# EAGLE board Retro|Watch (EAGLE 7.3.0)
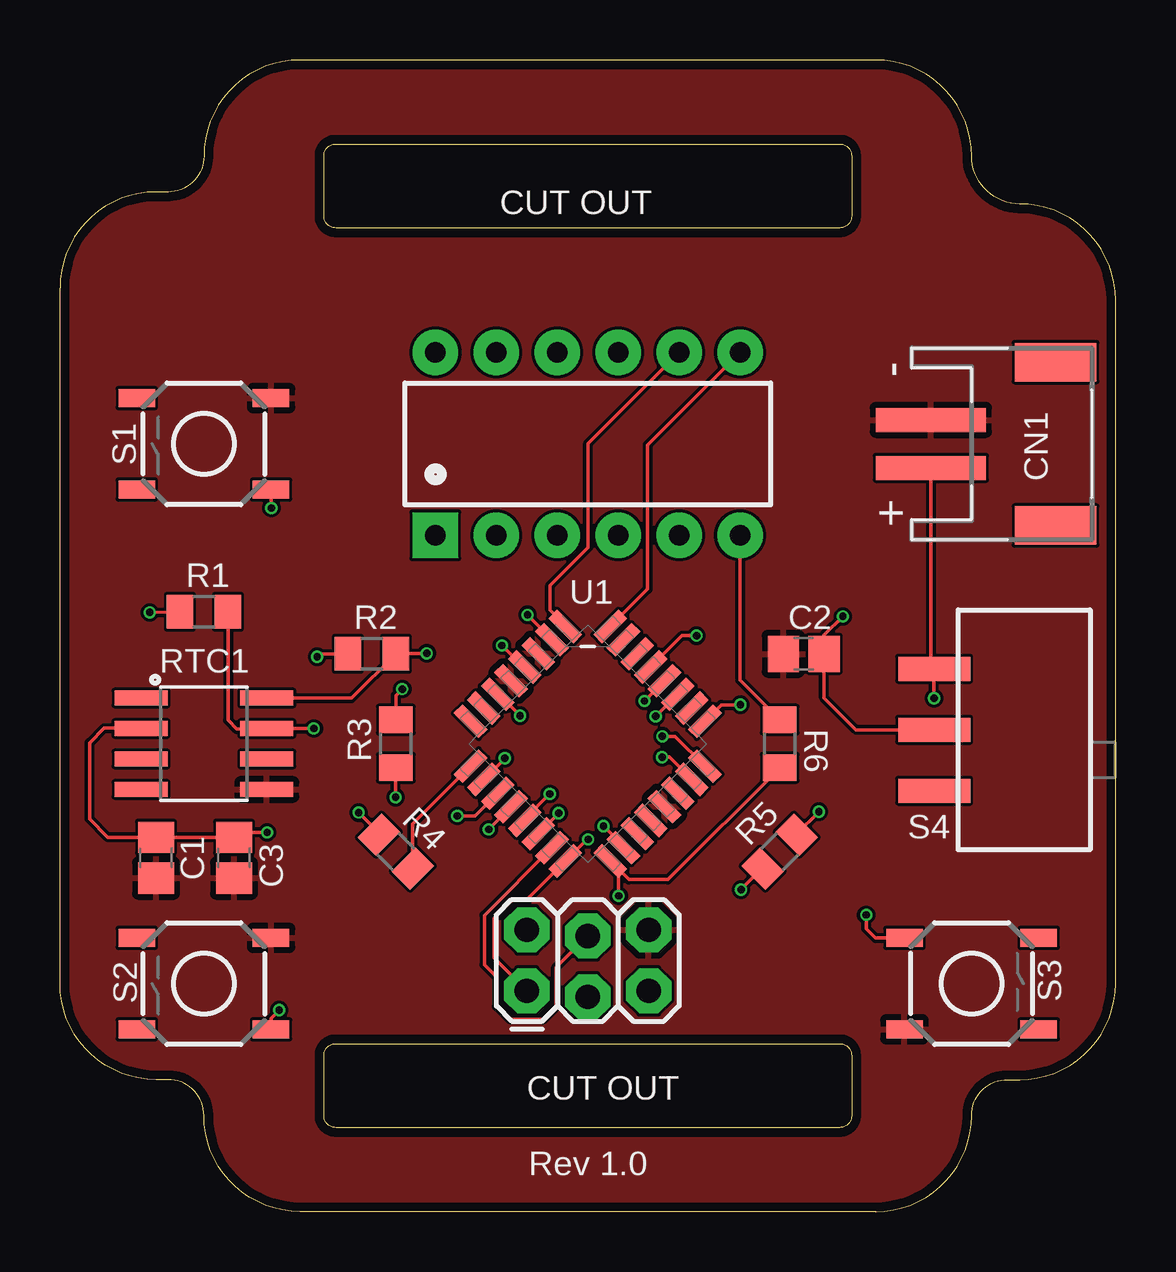
[diagram p0: board, top side]
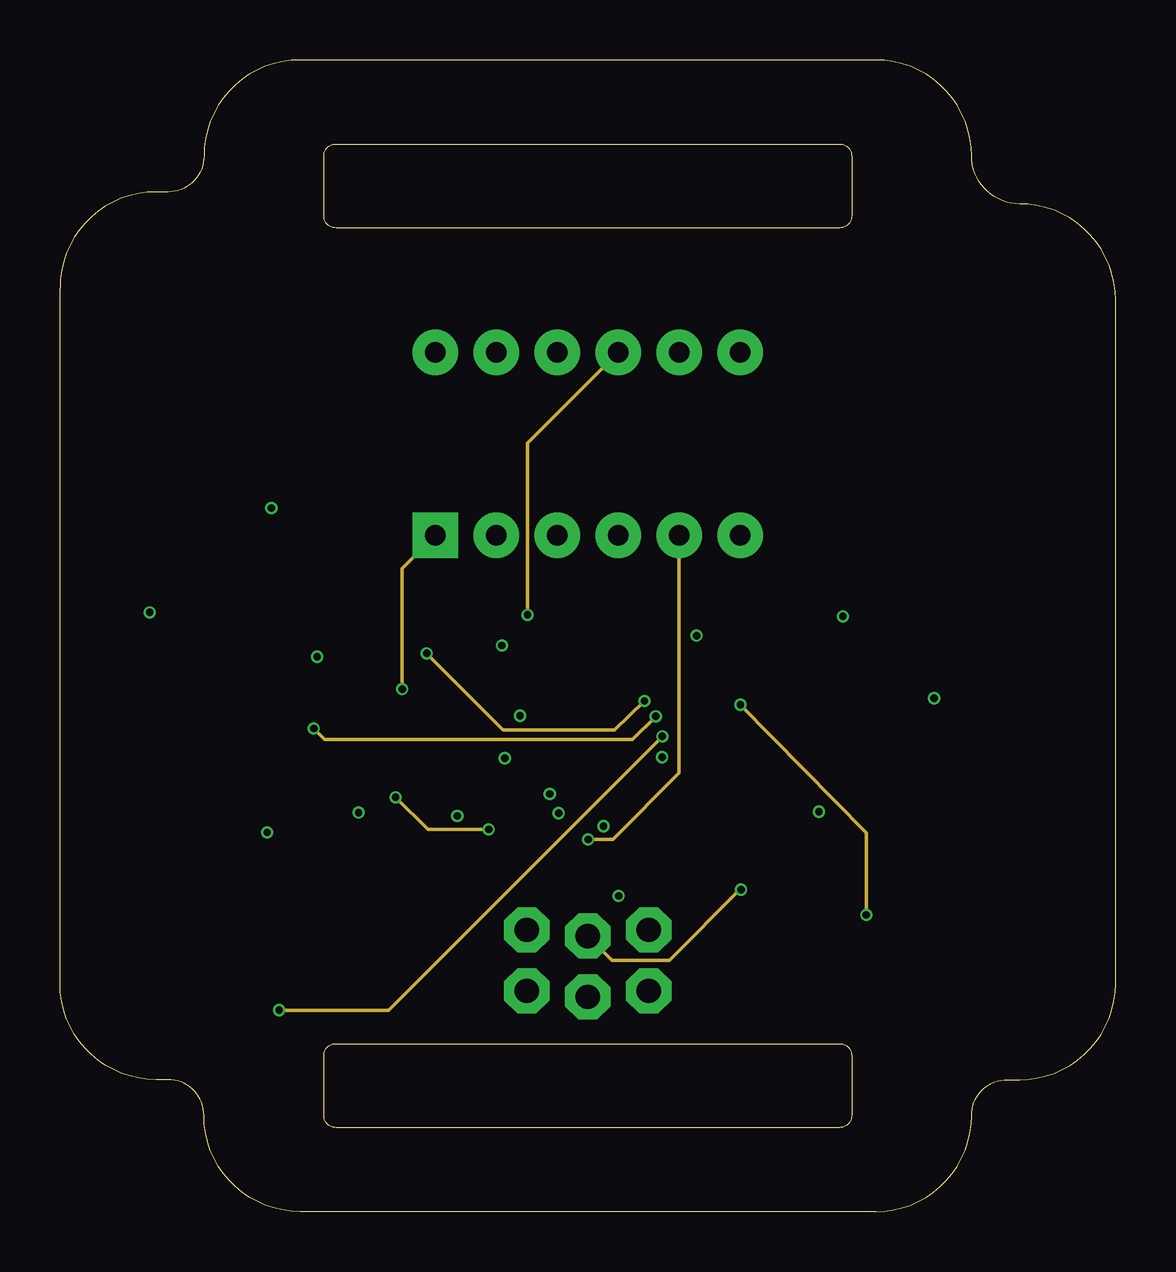
[diagram p1: board, inner layer Route2]
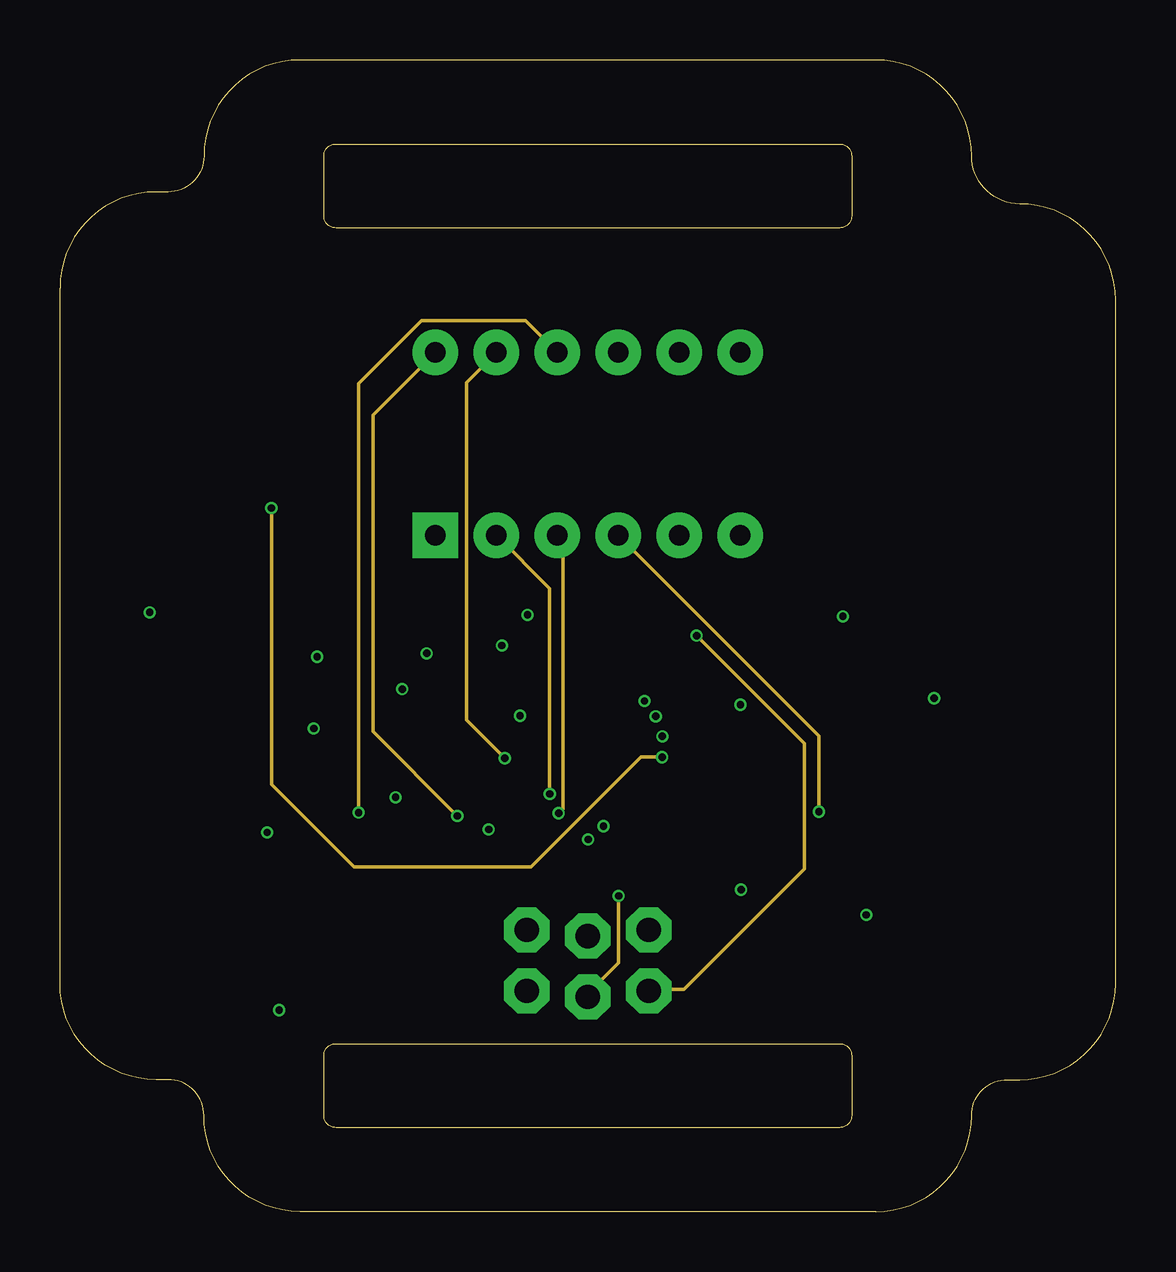
[diagram p2: board, inner layer Route15]
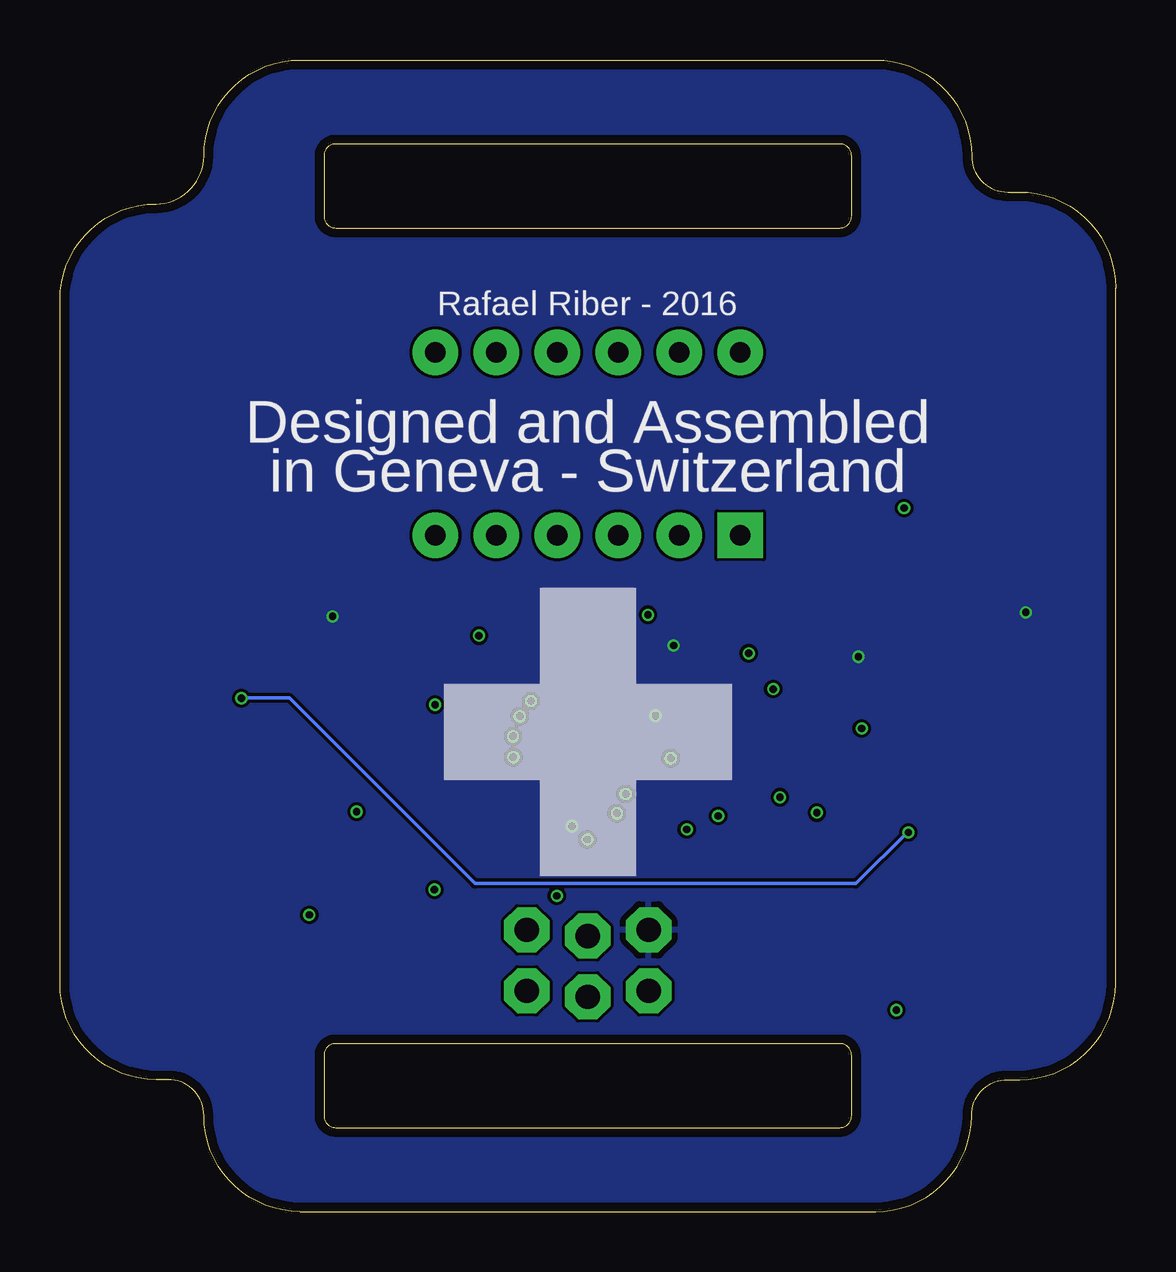
[diagram p3: board, bottom side, seen from below]

Size 44 x 48 mm. Coordinates in mm from the lower left corner, seen from the top.
Outline: 6,44 arc-90 4.5,42.5 4,42.5 arc90 0,38.5 0,9.5 arc90 4,5.5 4.5,5.5 arc-90 6,4 arc90 10,0 34,0 arc90 38,4 arc-90 39.5,5.5 40,5.5 arc90 44,9.5 44,38 arc90 40,42 arc-90 38,44 arc90 34,48 10,48 arc90 6,44
Outline: 33,44 33,41.5 arc-90 32.5,41 11.5,41 arc-90 11,41.5 11,44 arc-90 11.5,44.5 32.5,44.5 arc-90 33,44
Outline: 33,6.5 33,4 arc-90 32.5,3.5 11.5,3.5 arc-90 11,4 11,6.5 arc-90 11.5,7 32.5,7 arc-90 33,6.5
Copper layers (1*2*15*16): Top 0.035559375mm / dielectric 0.17018125mm / Route2 0.01778125mm / dielectric 47mil / Route15 0.01778125mm / dielectric 0.17018125mm / Bottom 0.035559375mm
Design rules "OSHPark-4layer *": minimum track width 5mil, minimum drill 10mil, track to track 5mil, track to pad 5mil, pad to pad 5mil, via to via 5mil, smd to smd 5mil, copper to edge 15mil, drill to drill 6mil, minimum pad ring 4mil, minimum via ring 4mil, stop-mask expansion 2.5mil, vias tented up to drill 20mil, thermal gap 10mil

## Footprints (pad centres in the part's own frame; a part is rotated, then mirrored left to right if it is on the bottom)
C0805 = smd 1.3 x 1.5: 1 -0.85,0; 2 0.85,0
JST-PH-2-SMT-RA = smd 1 x 4.6: 1 1,-3.7; 2 -1,-3.7 | smd 1.6 x 3.4: NC1 -3.4,1.5; NC2 3.4,1.5
DIL12 = drill 0.864 pad 1.905 square: 1 -6.35,-3.81 | drill 0.864 pad 1.905: 2 -3.81,-3.81; 3 -1.27,-3.81; 4 1.27,-3.81; 5 3.81,-3.81; 6 6.35,-3.81; 7 6.35,3.81; 8 3.81,3.81; 9 1.27,3.81; 10 -1.27,3.81; 11 -3.81,3.81; 12 -6.35,3.81
2X3_LOCK = drill 1.016 pad 1.88 octagon: 1 0,0; 2 0,2.54; 3 2.54,-0.254; 4 2.54,2.286; 5 5.08,0; 6 5.08,2.54
R0805 = smd 1.1 x 1.4: 1 -1,0; 2 1,0
SOIC8 = smd 0.61 x 2.21: 1 -1.905,-2.616; 2 -0.635,-2.616; 3 0.635,-2.616; 4 1.905,-2.616; 5 1.905,2.616; 6 0.635,2.616; 7 -0.635,2.616; 8 -1.905,2.616
TACTILE-SWITCH-SMD = smd 1.524 x 0.762: 1 -2.794,1.905; 2 2.794,1.905; 3 -2.794,-1.905; 4 2.794,-1.905
SWITCH-SPDT-SMD = smd 1 x 3: 1 -2.62,-3.56; 2 -0.08,-3.56; 3 2.46,-3.56
QFP80P900X900X120-32N = smd 1.473 x 0.508: 1 -4.115,2.794; 2 -4.115,2.007; 3 -4.115,1.194; 4 -4.115,0.406; 5 -4.115,-0.406; 6 -4.115,-1.194; 7 -4.115,-2.007; 8 -4.115,-2.794; 17 4.115,-2.794; 18 4.115,-2.007; 19 4.115,-1.194; 20 4.115,-0.406; 21 4.115,0.406; 22 4.115,1.194; 23 4.115,2.007; 24 4.115,2.794 | smd 0.508 x 1.473: 9 -2.794,-4.115; 10 -2.007,-4.115; 11 -1.194,-4.115; 12 -0.406,-4.115; 13 0.406,-4.115; 14 1.194,-4.115; 15 2.007,-4.115; 16 2.794,-4.115; 25 2.794,4.115; 26 2.007,4.115; 27 1.194,4.115; 28 0.406,4.115; 29 -0.406,4.115; 30 -1.194,4.115; 31 -2.007,4.115; 32 -2.794,4.115

## Placement (x,y rotation side)
C1  0.1 uF  [C0805]  4,14.75 270 top
C2  0.1 uF  [C0805]  31,23.25 180 top
C3  1 uF  [C0805]  7.25,14.75 270 top
CN1  JST-PH  [JST-PH-2-SMT-RA]  40,32 270 top
DISP1  hp  [DIL12]  22,32 0 top
JP1  ICSP  [2X3_LOCK]  19.46,9.2 0 top
LOGO1  OSHW-LOGOM-COPPER  [OSHW-LOGO-M_COPPER]  30,10 0 top
R1  10k  [R0805]  6,25 0 top
R2  10k  [R0805]  13,23.25 0 top
R3  560R  [R0805]  14,19.5 90 top
R4  560R  [R0805]  14,15 135 top
R5  560R  [R0805]  30,15 45 top
R6  560R  [R0805]  30,19.5 90 top
RTC1  DS3231M  [SOIC8]  6,19.5 270 top
S1  SKQGAFE010  [TACTILE-SWITCH-SMD]  6,32 180 top
S2  SKQGAFE010  [TACTILE-SWITCH-SMD]  6,9.5 180 top
S3  SKQGAFE010  [TACTILE-SWITCH-SMD]  38,9.5 0 top
S4  SS SMD402  [SWITCH-SPDT-SMD]  40,20 270 top
U1  ATMEGA328P-AU  [QFP80P900X900X120-32N]  22,19.5 315 top
U$1  [LOGO]  10,8.5 0 top

## Library data of the parts
C1 C2 = adafruit; MF: WALSIN; MPN: 0805B104K500CT; OC_FARNELL: 2496944
C3 CN1 R1-R6 = adafruit; OC_FARNELL: unknown
DISP1 = SparkFun-Displays; OC_FARNELL: unknown; STOREFRONT: COM-12710
JP1 = SparkFun-Connectors; OC_FARNELL: unknown
LOGO1 = SparkFun-Aesthetics; OC_FARNELL: unknown
RTC1 = SparkFun-DigitalIC; OC_FARNELL: unknown; PROD_ID: IC-11985
S1-S3 = SparkFun-Electromechanical; OC_FARNELL: unknown; PROD_ID: SWCH-08247
S4 = SparkFun-Electromechanical; OC_FARNELL: unknown
U1 = Atmel_By_element14_Batch_1-00; MF: ATMEL; MPN: ATMEGA328P-AU; OC_FARNELL: 1715486; OC_NEWARK: 14R4631; PACKAGE: TQFP-32; SUPPLIER: Atmel
U$1 = atmel

## Nets
GND: C1.2 C2.2 C3.2 CN1.2 JP1.6 RTC1.5 S1.3 S2.3 S3.3 U1.3 U1.5 U1.21
MISO: DISP1.5 JP1.1 U1.16
MOSI: JP1.4 R5.1 U1.15
N$1: DISP1.1 R3.2
N$2: DISP1.10 R4.2
N$3: DISP1.4 R5.2
N$4: DISP1.6 R6.2
PB0: R3.1 U1.12
PB1: DISP1.2 U1.13
PB2: DISP1.3 U1.14
PB6: U1.7
PB7: U1.8
PC0: S1.1 U1.23
PC1: S2.1 U1.24
PC2: S3.1 U1.25
PC3: U1.26
PD0: U1.30
PD1: U1.31
PD2: DISP1.7 U1.32
PD3: DISP1.8 U1.1
PD4: DISP1.9 U1.2
PD5: R4.1 U1.9
PD6: DISP1.11 U1.10
PD7: DISP1.12 U1.11
RESET: JP1.5 U1.29
RTC_VCC: C1.1 C3.1 CN1.1 RTC1.2 S4.1
SCK: JP1.3 R6.1 U1.17
SCL: R2.2 RTC1.8 U1.28
SDA: R1.2 RTC1.7 U1.27
VBAT: RTC1.6
VCC: C2.1 JP1.2 R1.1 R2.1 S4.2 U1.4 U1.6 U1.18

## Tracks (layer width: path | path; a pad name or v marks a point on that pad's centre or on a via)
GND
  pour Top: 0,0 44,0 44,49 0,49
MISO  (via drill 0.3)
  Top 0.152: JP1.1 18.1,10.56 18.1,12.22 18.89,13.02 19.47,13.02 U1.16 21.96,15.51 v22.02,15.51
  Route2 0.152: DISP1.5 25.81,18.28 23.05,15.51 22.02,15.51 v22.02,15.51
MOSI  (via drill 0.3)
  Top 0.152: v28.39,13.42 29.27,14.29 R5.1 | U1.15 17.69,12.35 17.69,10.29 18.22,9.76 18.22,8.55 18.75,8.01 20.16,8.01 20.69,8.54 20.69,10.17 JP1.4
  Route2 0.152: JP1.4 23.02,10.47 25.4,10.47 28.34,13.42 v28.39,13.42
N$1  (via drill 0.3)
  Top 0.152: R3.2 14,21.51 v14.27,21.78
  Route2 0.152: v14.27,21.78 14.27,26.8 DISP1.1
N$2  (via drill 0.3)
  Top 0.152: R4.2 13.29,15.79 v12.45,16.63
  Route15 0.152: v12.45,16.63 12.45,34.52 15.07,37.13 19.41,37.13 DISP1.10
N$3  (via drill 0.3)
  Top 0.152: v31.63,16.66 30.71,15.74 R5.2
  Route15 0.152: DISP1.4 31.63,19.83 v31.63,16.66
N$4
  Top 0.152: DISP1.6 28.35,22.15 R6.2
PB0  (via drill 0.3)
  Top 0.152: U1.12 v17.87,15.93 | v13.99,17.27 R3.1
  Route2 0.152: v17.87,15.93 15.33,15.93 v13.99,17.27
PB1  (via drill 0.3)
  Top 0.152: v20.42,17.41 19.38,16.37 U1.13
  Route15 0.152: DISP1.2 20.42,25.96 v20.42,17.41
PB2  (via drill 0.3)
  Top 0.152: U1.14 20.79,16.6 v20.79,16.61
  Route15 0.152: v20.79,16.61 20.96,16.78 20.96,27.72 20.73,27.95 DISP1.3
PC0  (via drill 0.3)
  Top 0.152: U1.23 25.4,18.94 v25.1,18.94 | v8.81,29.32 8.79,29.34 S1.1
  Route15 0.152: v25.1,18.94 24.21,18.94 19.63,14.36 12.26,14.36 8.81,17.81 v8.81,29.32
PC1  (via drill 0.3)
  Top 0.152: S2.1 8.79,8.05 v9.14,8.39 | v25.11,19.81 25.64,19.81 U1.24
  Route2 0.152: v9.14,8.39 13.7,8.39 v25.11,19.81
PC2  (via drill 0.3)
  Top 0.152: 35.17,11.37 S3.1 33.99,11.4 33.61,11.79 v33.61,12.37 | U1.25 27.57,21.12 v28.37,21.12
  Route2 0.152: v33.61,12.37 33.61,15.77 v28.37,21.12
PD2
  Top 0.152: DISP1.7 24.49,31.95 24.49,25.94 U1.32
PD3
  Top 0.152: U1.1 21.07,24.45 20.44,25.08 20.44,26.1 22.02,27.68 22.02,32.02 DISP1.8
PD4  (via drill 0.3)
  Top 0.152: v19.49,24.87 20.51,23.85 U1.2
  Route2 0.152: DISP1.9 19.49,32.03 v19.49,24.87
PD5
  Top 0.152: R4.1 14.71,16.16 U1.9
PD6  (via drill 0.3)
  Top 0.152: U1.10 v18.54,18.88 v18.54,18.89
  Route15 0.152: v18.54,18.89 16.94,20.5 16.94,34.56 DISP1.11
PD7  (via drill 0.3)
  Top 0.152: v16.56,16.49 17.3,16.49 U1.11
  Route15 0.152: DISP1.12 13.05,33.21 13.05,20 v16.56,16.49
RESET  (via drill 0.3)
  Top 0.152: U1.29 25.93,24.01 v26.54,24.01
  Route15 0.152: JP1.5 24.54,9.26 26.01,9.26 31.04,14.28 31.04,19.5 v26.54,24.01
RTC_VCC  (via drill 0.3)
  Top 0.152: CN1.1 36.3,22.76 S4.1 v36.44,21.4 | v8.63,15.8 7.45,15.8 C3.1 C1.1 2,15.6 1.23,16.37 1.23,19.54 1.85,20.15 RTC1.2
  Bottom 0.152: v8.63,15.8 8.66,15.83 10.82,13.67 26.7,13.67 34.42,21.4 v36.44,21.4
SCK  (via drill 0.3)
  Top 0.152: U1.17 23.28,14.27 | v23.29,13.16 23.29,14.26 U1.17 | R6.1 25.34,13.84 23.71,13.84 U1.17
  Route15 0.152: v23.29,13.16 23.29,10.37 22,9.09 JP1.3
SCL  (via drill 0.3)
  Top 0.152: RTC1.8 12.15,21.41 R2.2 14.02,23.27 v15.29,23.27 | v24.36,21.29 24.41,21.33 U1.28
  Route2 0.152: v15.29,23.27 18.48,20.08 23.11,20.08 v24.36,21.29
SDA  (via drill 0.3)
  Top 0.152: R1.2 7,20.49 7.37,20.11 8.59,20.11 RTC1.7 v10.58,20.14 v10.58,20.13 | v24.84,20.64 v24.84,20.65 U1.27
  Route2 0.152: v10.58,20.13 11.04,19.67 23.86,19.67 v24.84,20.64
VCC  (via drill 0.3)
  Top 0.152: S4.2 33.18,20.08 31.85,21.41 C2.1 31.85,24.02 v32.63,24.81 | U1.4 19.32,22.7 v18.42,23.59 | v19.18,20.67 18.28,21.57 U1.6 | v22.65,16.06 23.49,15.23 U1.18 | v3.74,24.97 R1.1 | v10.72,23.12 10.85,23.25 R2.1
  pour Bottom: 0,0 44,0 44,49 0,49

## Text on the board
tNames: CUT OUT | CUT OUT | Rev 1.0
bNames: Rafael Riber - 2016 | Designed and Assembled / in Geneva - Switzerland
tStop: RETRO | | | WATCH